# Altium PCB FlightController_Top_6x6.PcbDoc (part 2 of 6)
Units mm, origin at the board's own origin, x right, y up, seen from the top; angles counter-clockwise.
Board outline 149.8 x 149.8 mm, 2 copper layers (Top Layer, Bottom Layer); 156 components, 166 nets, 860 pads, 423 vias.
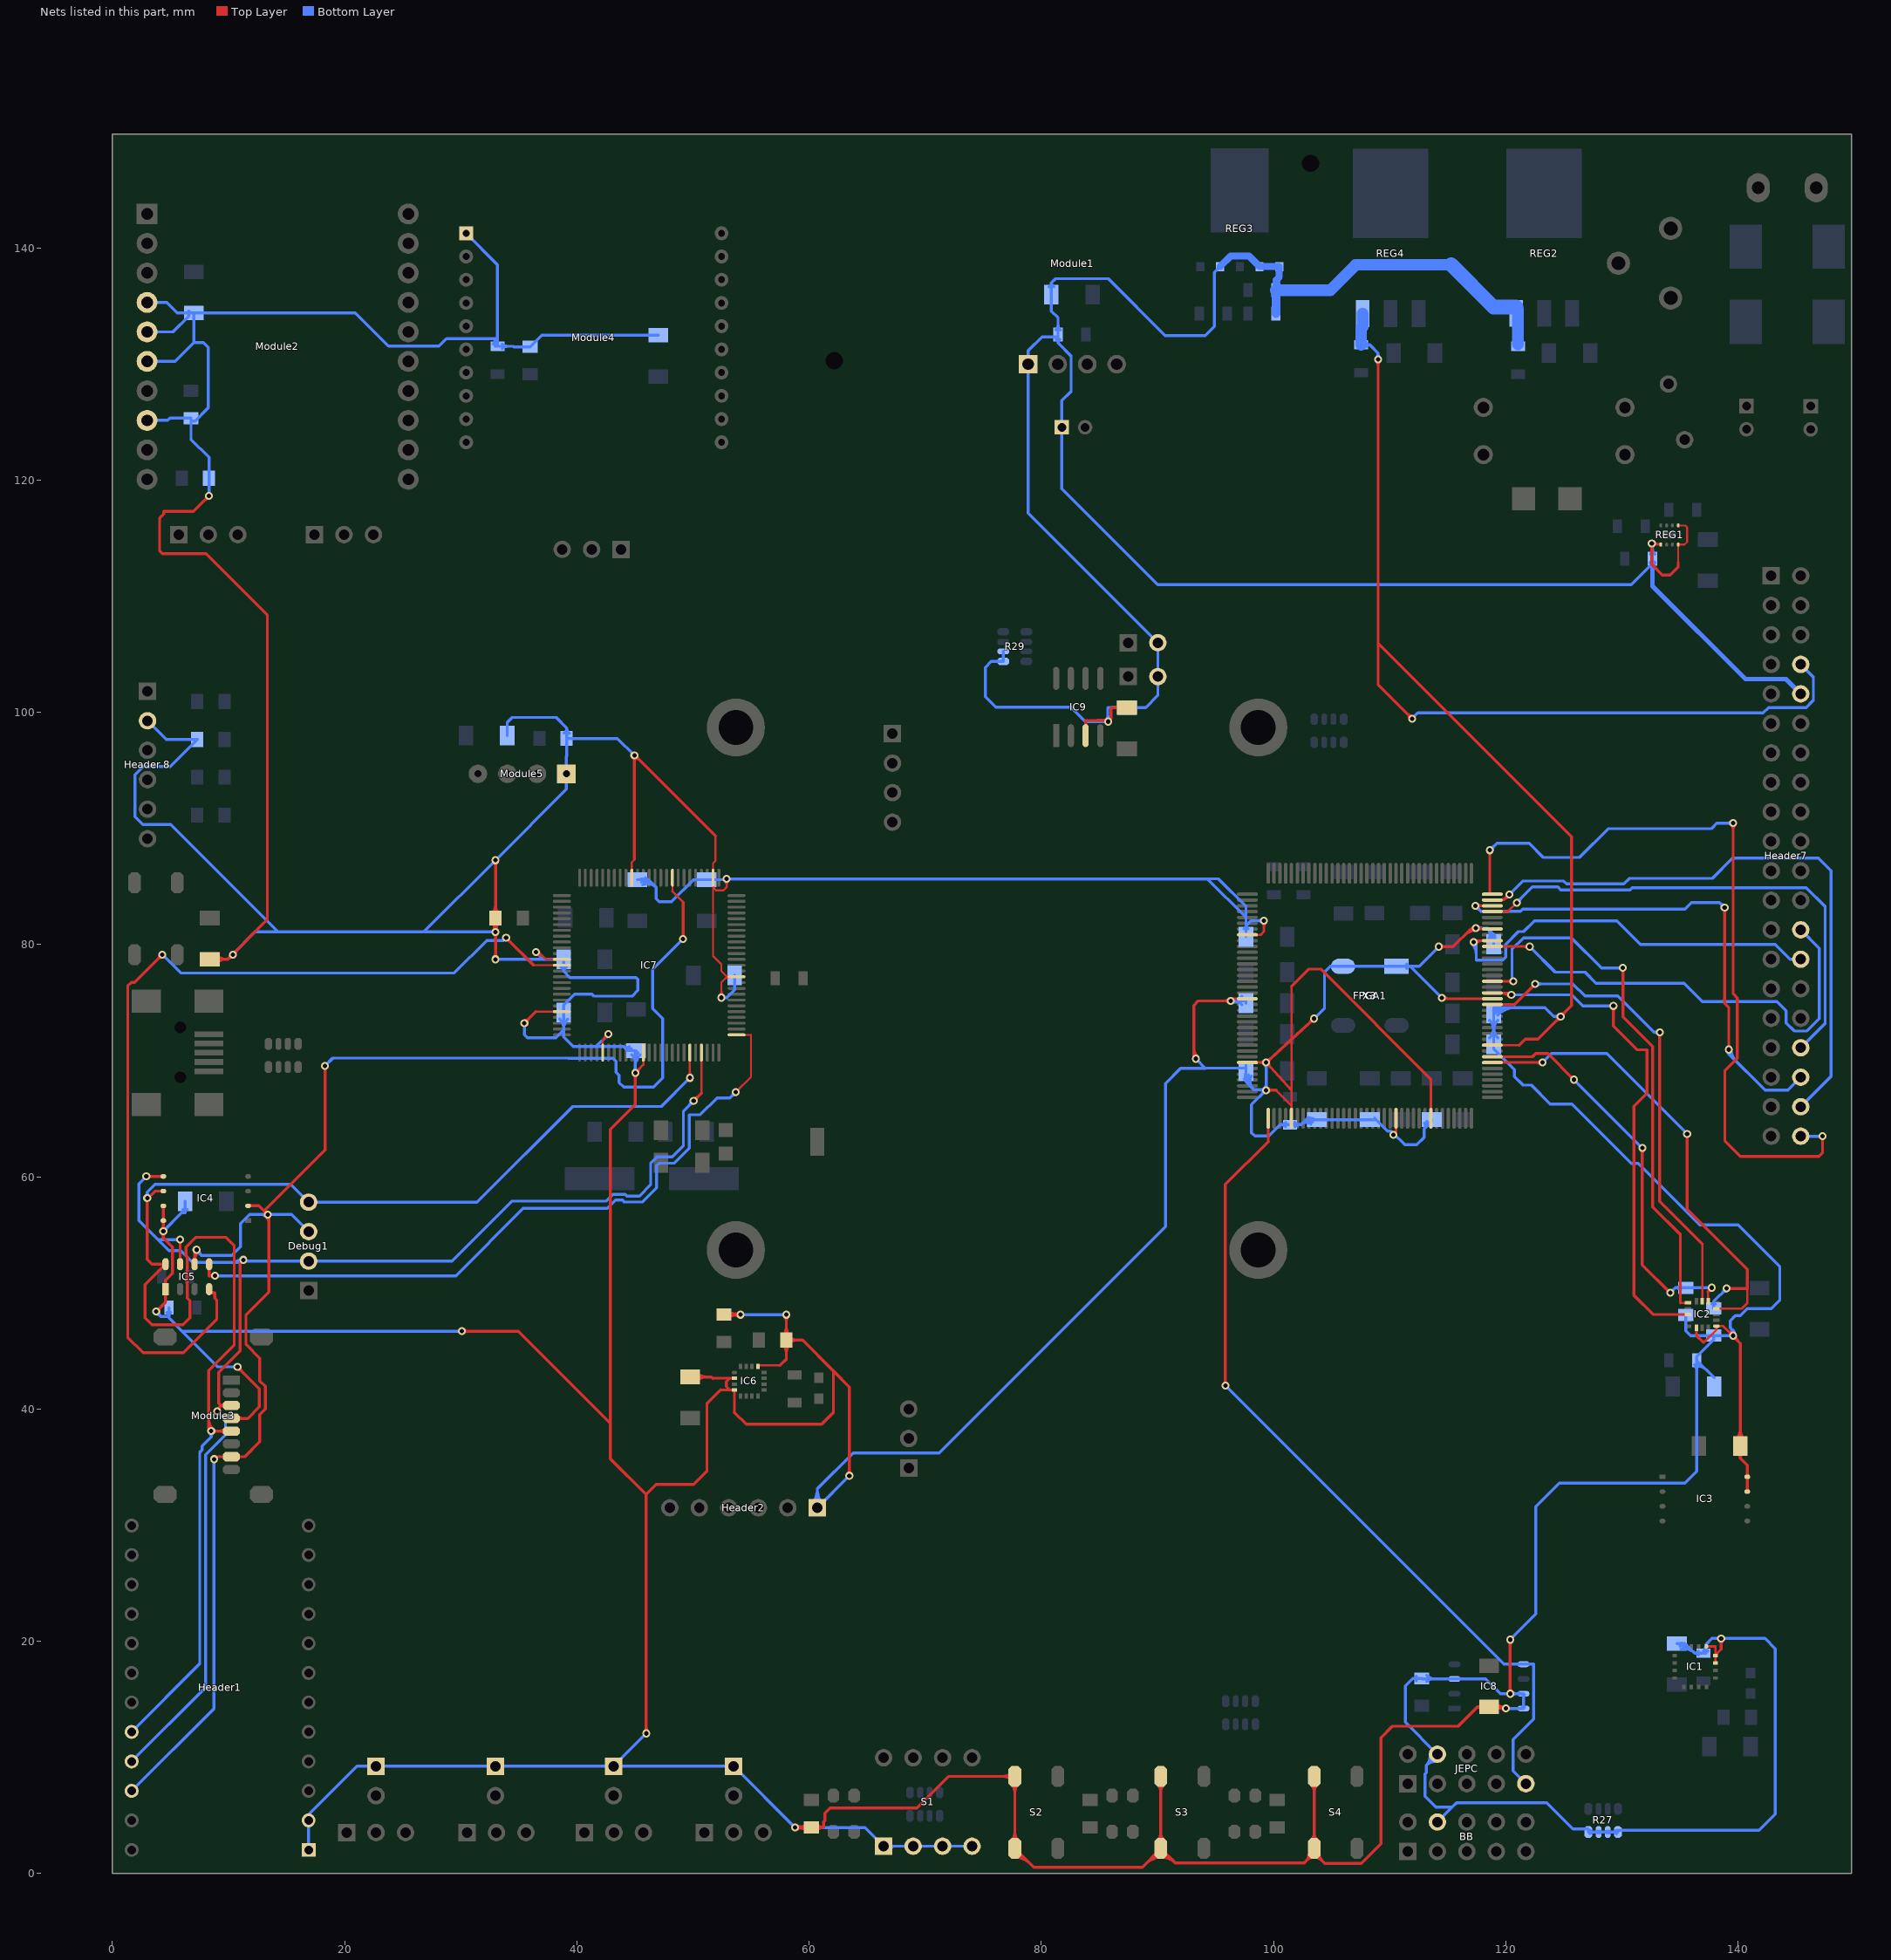
[diagram p2: the nets of this part, all layers, seen from the top]

## Via types
v1: diameter 0.686, hole 0.381, Top Layer to Bottom Layer, 391 vias
v2: diameter 1.27, hole 0.711, Top Layer to Bottom Layer, 32 vias

## Nets (pads, with @x,y where several pads share a name; then routed paths per layer and width w, separated by ;. In a path a pad name is that pad's centre, name@x,y a point inside that pad or via, vN(x,y) a via of type N, cw(c..) or ccw(c..) an arc to the next point about the centre after c; other vN are vias at no path point) (continued)
+3.3V: "Header 8.2" BB.4 C1.1 C2.2 C3.1 C4.1 C8.1 C12.1 C13.1 C14.1 C15.2 C17.1 C18.1 C19.2 C21.1 C23.2 C24.1 C25.1 C26.1 C27.1 C28.1 C29.1 C47.1 C58.1 C59.1 C62.1 C63.1 C64.1 C67.1 C68.1 C71.1 C72.1 C73.1 C75.1 FPGA1.5 FPGA1.23 FPGA1.29 FPGA1.46 FPGA1.54 FPGA1.66 FPGA1.116 FPGA1.127 FPGA1.138 Header1.1 Header1.2 Header2.1 Header7.8 IC1.1 IC1.15 IC1.16 IC2.1 IC2.14 IC3.7 IC3.8 IC4.7 IC4.8 IC5.1 IC6.2 IC6.4 IC6.13 IC7.2 IC7.16 IC7.37 IC7.46 IC7.55 IC7.62 IC7.86 IC8.3 IC8.7 IC8.8 J1.1 J2.1 J3.1 J4.1 JEPC.4 Module2.4 Module2.5 Module2.6 Module2.8 Module3.4 Module4.1 Module5.1 R1.2 R2.1 R8.1 R9.1 R10.2 R11.2 R12.2 R16.2 R17.2 R21.2 R27.5 R27.6 R27.7 R27.8 R28.1 REG4.3 S1.1 S1.2 S1.3 S1.4 S2.1 S3.1 S4.1 X3.1 X3.4 | length 1483.9
  Top Layer w0.17: 36.462,74.231 IC7.46@38.704,74.231 ; 37.359,78.731 IC7.37@38.704,78.731 ; IC7.55@42.229,70.707 42.229,71.801 ; IC7.16@44.729,85.756 44.729,87.097 ; 45.729,69.656 IC7.62@45.729,70.707 ; 51.729,79.03 51.729,84.933 ; 51.729,87.01 IC7.2@51.729,85.756 51.729,84.933 ; IC7.2@51.769,85.106 ccw(c52.285,85.106) 51.92,84.742 ; 51.983,84.679 51.729,84.933 ; 52.445,77.715 52.929,77.232 ; 52.446,76.749 52.929,77.232 ; 52.737,77.039 cw(c53.104,76.672) IC7.86@53.104,77.192 ; 52.737,77.424 ccw(c53.104,77.791) IC7.86@53.104,77.272 ; IC7.86@53.754,77.232 52.929,77.232
  Top Layer w0.175: v1@36.47,79.115 cw(c36.47,77.894) 37.333,78.757 ; v1@36.47,79.29 cw(c36.47,78.492) 37.034,79.056 ; v1@36.72,79.37 37.359,78.731 ; 42.229,71.801 v1(42.718,72.29) ; v1@42.463,72.29 cw(c41.846,72.29) 42.282,71.854 cw(c42.718,71.418) v1@42.718,72.035 ; 44.729,87.097 44.953,87.321 ; v1(45.03,68.956) 45.729,69.656 ; v1@45.03,69.212 ccw(c45.03,69.829) 45.466,69.393 ccw(c45.902,68.956) v1@45.285,68.956 ; 51.729,79.03 52.445,78.314 52.445,77.715 ; 51.729,87.01 51.938,87.219 51.938,89.353 ; 51.983,84.679 52.624,84.679 52.904,84.958 v1(52.904,85.67) ; v1@52.266,75.614 ccw(c51.83,76.05) 52.446,76.05 ccw(c53.063,76.05) v1@52.627,75.614 ; v1(52.446,75.433) 52.446,76.749 ; v1@52.723,85.489 cw(c52.287,85.053) 52.904,85.053 cw(c53.52,85.053) v1@53.084,85.489
  Top Layer w0.2: IC1.15@138.062,18.133 IC1.16@138.062,18.783 138.062,19.558 ; IC1.16@138.062,18.809 138.557,19.304 ; IC1.16@138.162,18.783 cw(c138.466,18.783) 138.251,18.998
  Top Layer w0.21: 51.699,42.65 53.183,42.65 ; 52.396,41.65 53.183,41.65 ; 52.869,41.964 53.183,41.65 ; 52.869,42.336 53.183,42.65 ; 53.564,39.721 IC6.4@53.564,41.65 53.183,41.65 ; IC6.2@53.564,42.65 53.183,42.65 ; IC6.13@55.589,43.675 55.589,43.76 57.508,43.76 ; v1(96.312,75.154) 96.502,75.344 FPGA1.127@97.752,75.344 ; FPGA1.138@97.752,69.844 v1(99.373,69.844) 101.552,67.449 ; FPGA1.116@97.752,80.844 98.903,80.844 99.182,81.123 v1(99.182,82.063) ; v1@99.014,81.895 cw(c98.608,81.488) 99.182,81.488 cw(c99.757,81.488) v1@99.351,81.895 ; v1@99.205,69.676 ccw(c98.798,69.269) 98.798,69.844 ccw(c98.798,70.419) v1@99.205,70.012 ; v1@99.362,69.606 cw(c99.335,69.032) 99.759,69.419 cw(c100.184,69.806) v1@99.611,69.833 ; 100.231,67.458 101.552,66.137 ; FPGA1.5@101.552,65.044 101.552,66.137 ; 101.552,76.393 101.552,71.843 101.552,67.449 ; v1(110.329,63.616) 110.552,63.839 FPGA1.23@110.552,65.044 ; FPGA1.29@113.552,65.044 113.552,68.424 ; v1@114.571,75.344 FPGA1.54@118.852,75.344 ; v1@114.675,75.24 cw(c114.927,74.988) 114.927,75.344 ; v1@114.675,75.576 ccw(c115.236,76.137) 115.236,75.344 ; 117.047,81.344 cw(c117.047,81.056) v1@117.251,81.26 ; v1@117.192,81.497 cw(c116.985,81.561) 116.985,81.344 v1@117.503,81.344 ; v1(117.42,81.428) v1@117.503,81.344 ; v1@117.588,81.26 cw(c117.792,81.056) 117.792,81.344 ; v1@117.588,81.596 ccw(c118.197,82.205) FPGA1.66@118.197,81.344 ; FPGA1.46@118.852,71.344 121.179,71.344 ; FPGA1.66@118.852,81.344 v1@117.503,81.344 ; 136.436,46.325 IC2.14@136.436,47.01 ; 137.06,45.741 138.153,46.833 IC2.1@138.153,47.144 138.719,47.144 v1@139.568,46.295 ; IC1.1@137.287,19.558 138.062,19.558 ; 139.094,46.769 ccw(c139.596,47.27) v1@139.596,46.561 ; 139.229,46.634 cw(c138.918,46.323) v1@139.358,46.323 ; 101.552,66.137 101.552,67.449
  Top Layer w0.254: v1(3.77,48.393) 4.572,49.195 IC5.1@4.572,50.33 4.572,51.1 5.177,51.705 5.177,53.945 4.381,54.741 v1(4.381,55.317) IC4.8@4.381,56.231 IC4.7@4.381,57.501 ; v1@3.77,48.609 ccw(c3.77,49.131) 4.139,48.762 ccw(c4.508,48.393) v1@3.986,48.393 ; v1@4.228,55.164 cw(c3.86,54.795) 4.381,54.795 cw(c4.902,54.795) v1@4.534,55.164 ; v1@4.228,55.469 ccw(c3.86,55.838) 4.381,55.838 ccw(c4.902,55.838) v1@4.534,55.469 ; IC5.1@4.467,49.975 cw(c4.215,49.723) 4.572,49.723 cw(c4.929,49.723) IC5.1@4.677,49.975 ; IC5.1@4.467,50.685 ccw(c4.215,50.937) 4.572,50.937 ccw(c4.929,50.937) IC5.1@4.677,50.685 ; v1@8.101,118.655 cw(c7.58,118.655) 7.948,118.286 cw(c8.317,117.917) v1@8.317,118.439 ; v1(8.317,118.655) 6.98,117.318 4.415,117.318 4.415,117.095 4.064,116.744 4.064,113.888 4.287,113.665 8.068,113.665 13.335,108.398 13.335,82.151 9.927,78.743 ; C15.2@8.382,78.743 9.927,78.743 ; C15.2@8.959,78.391 cw(c9.809,77.541) 9.809,78.743 cw(c9.809,79.945) C15.2@8.959,79.095 ; 10.026,78.842 ccw(c9.744,79.124) v1@10.143,79.124 ; Module3.4@10.239,39.198 11.652,39.198 12.658,40.204 12.658,41.74 v1(10.765,43.633) ; v1@10.35,78.908 ccw(c10.327,78.343) 9.927,78.743 ; v1@10.359,79.34 ccw(c10.359,79.739) 10.641,79.457 ; v1@10.575,79.124 cw(c11.219,79.124) 10.763,79.579 ; v1@10.765,43.417 cw(c10.765,42.895) 11.134,43.264 cw(c11.502,43.633) v1@10.981,43.633 ; Module3.4@10.782,39.005 cw(c11.248,38.539) 11.248,39.198 cw(c11.248,39.857) Module3.4@10.782,39.391 ; v1(30.094,46.706) 34.955,46.706 42.896,38.765 ; v1@30.247,46.553 cw(c30.616,46.185) 30.616,46.706 cw(c30.616,47.227) v1@30.247,46.859 ; R16.2@32.708,81.889 cw(c32.028,81.21) 32.989,81.21 cw(c33.95,81.21) R16.2@33.271,81.889 ; R16.2@32.708,82.702 ccw(c32.028,83.381) 32.989,83.381 ccw(c33.95,83.381) R16.2@33.271,82.702 ; v1@32.807,81.214 ccw(c32.356,81.503) 32.874,81.642 ; v1@32.837,78.888 ccw(c32.468,79.257) 32.989,79.257 ccw(c33.511,79.257) v1@33.142,78.888 ; v1@32.837,80.945 cw(c32.468,80.576) 32.989,80.576 cw(c33.511,80.576) v1@33.142,80.945 ; v1@32.837,81.25 ccw(c32.468,81.619) 32.989,81.619 ccw(c33.511,81.619) v1@33.142,81.25 ; v1@32.837,87.116 cw(c32.468,86.748) 32.989,86.748 cw(c33.511,86.748) v1@33.142,87.116 ; v1@32.881,81.285 ccw(c32.67,81.651) 33.078,81.541 ; 32.901,81.541 ccw(c33.309,81.651) v1@33.097,81.285 ; v1(32.989,78.735) v1(32.989,81.098) R16.2@32.989,82.296 v1@32.989,87.268 ; 33.105,81.642 ccw(c33.623,81.503) v1@33.171,81.214 ; v1(35.479,73.249) 36.462,74.231 ; v1@35.479,73.465 ccw(c35.479,73.986) 35.848,73.618 ccw(c36.217,73.249) v1@35.695,73.249 ; v1(36.47,79.37) v1@36.72,79.37 ; v1@44.801,96.149 cw(c44.432,95.78) 44.953,95.78 cw(c45.475,95.78) v1@45.106,96.149 ; v1@44.877,68.804 cw(c44.508,68.435) 45.03,68.435 cw(c45.551,68.435) v1@45.182,68.804 ; 44.953,87.321 v1(44.953,96.302) ; v1@44.953,96.086 cw(c44.953,95.478) 45.383,95.908 ; v1@44.989,96.302 51.938,89.353 ; v1(45.03,68.956) 45.03,66.239 42.896,64.105 42.896,38.765 ; v1@45.169,96.302 ccw(c45.604,96.302) 45.297,95.994 ; v1@45.817,12.213 ccw(c45.448,12.582) 45.969,12.582 ccw(c46.491,12.582) v1@46.122,12.213 ; v1(45.969,12.06) 45.969,32.634 ; C21.1@49.754,42.766 51.583,42.766 51.699,42.65 ; C21.1@50.331,42.414 cw(c51.181,41.564) 51.181,42.766 cw(c51.181,43.968) C21.1@50.331,43.118 ; 52.396,41.65 51.202,40.456 51.202,34.641 50.059,33.498 46.833,33.498 45.969,32.634 ; R11.2@52.675,48.135 53.786,48.135 53.793,48.128 v1(54.102,48.128) ; 52.869,41.964 52.869,42.336 ; R11.2@53.081,47.854 cw(c53.761,47.174) 53.761,48.135 cw(c53.761,49.096) R11.2@53.081,48.416 ; 53.418,48.227 ccw(c53.605,48.927) v1@53.988,48.312 ; 53.439,48.049 cw(c53.605,47.428) v1@53.977,47.952 ; 53.564,39.721 54.599,38.686 58.295,38.686 58.314,38.705 61.082,38.705 62.098,39.721 62.098,43.277 ; 53.565,48.135 cw(c53.565,47.591) v1@53.949,47.976 ; 53.596,48.135 ccw(c53.596,48.634) v1@53.949,48.281 ; 57.508,43.76 58.041,44.293 R12.2@58.041,45.944 ; R12.2@57.76,45.538 cw(c57.08,44.858) 58.041,44.858 cw(c59.002,44.858) R12.2@58.322,45.538 ; R12.2@57.76,46.35 ccw(c57.08,47.03) 58.041,47.03 ccw(c59.002,47.03) R12.2@58.322,46.35 ; v1@57.888,47.976 cw(c57.52,47.607) 58.041,47.607 cw(c58.562,47.607) v1@58.194,47.976 ; v1(58.041,48.128) R12.2@58.041,45.944 ; R12.2@58.322,45.663 cw(c59.002,44.983) 59.002,45.944 cw(c59.002,46.905) R12.2@58.322,46.225 ; v1(58.793,3.958) 59.076,3.958 59.087,3.969 R21.2@60.198,3.969 61.26,3.969 ; v1@58.903,4.143 ccw(c59.28,4.778) 59.471,4.065 ; v1@58.921,3.784 cw(c59.28,3.297) 59.437,3.882 ; v1@58.945,3.805 cw(c59.34,3.41) 59.34,3.969 ; v1@58.945,4.111 ccw(c59.288,4.453) 59.288,3.969 ; v1@58.98,3.85 cw(c59.217,3.713) 59.146,3.978 ; R21.2@59.792,3.687 ccw(c59.112,3.008) 59.112,3.969 ccw(c59.112,4.929) R21.2@59.792,4.25 ; R21.2@60.609,3.692 cw(c61.26,3.064) 61.26,3.969 ; R21.2@60.609,4.245 ccw(c61.26,4.873) 61.26,3.969 ; v1@63.317,34.413 ccw(c62.949,34.781) 63.47,34.781 ccw(c63.991,34.781) v1@63.623,34.413 ; v1(63.47,34.26) 63.47,41.905 62.098,43.277 ; S2.1@77.425,2.808 ccw(c76.703,3.53) 77.724,3.53 ccw(c78.745,3.53) S2.1@78.023,2.808 ; S2.1@77.425,7.71 cw(c76.703,6.988) 77.724,6.988 cw(c78.745,6.988) S2.1@78.023,7.71 ; S2.1@77.425,8.06 ccw(c76.703,7.338) 76.703,8.359 ccw(c76.703,9.38) S2.1@77.425,8.658 ; S2.1@77.724,1.386 cw(c77.724,-0.48) 79.044,0.839 ; S2.1@77.724,1.64 cw(c77.724,0.387) 78.61,1.273 ; 89.029,0.861 cw(c90.297,-0.408) S3.1@90.297,1.386 ; 89.462,1.294 cw(c90.297,0.46) S3.1@90.297,1.64 ; S3.1@89.998,2.808 ccw(c89.276,3.53) 90.297,3.53 ccw(c91.318,3.53) S3.1@90.596,2.808 ; S3.1@89.998,7.71 cw(c89.276,6.988) 90.297,6.988 cw(c91.318,6.988) S3.1@90.596,7.71 ; S3.1@90.297,8.359 S3.1@90.297,2.159 ; S3.1@90.305,1.64 cw(c90.356,0.533) 91.139,1.317 ; S3.1@90.316,1.386 cw(c90.391,-0.245) 91.546,0.91 ; 93.137,70.513 ccw(c93.653,70.513) v1@93.288,70.149 ; 93.137,71.126 ccw(c94.266,71.126) v1@93.468,70.328 ; v1(93.315,70.176) 93.137,70.353 93.137,74.773 93.518,75.154 v1(96.312,75.154) ; v1@96.159,75.001 ccw(c95.791,74.633) 95.791,75.154 ccw(c95.791,75.675) v1@96.159,75.307 ; v1(99.36,67.458) 100.231,67.458 ; v1(99.373,69.844) 101.552,71.843 v1(103.5,73.63) ; v1@99.382,70.06 ccw(c99.405,70.581) 99.757,70.196 ccw(c100.11,69.812) v1@99.589,69.835 ; v1@99.513,67.305 cw(c99.882,66.936) 99.882,67.458 cw(c99.882,67.979) v1@99.513,67.611 ; 101.552,76.393 103.056,77.897 104.079,77.897 113.552,68.424 ; 102.761,1.034 ccw(c101.986,1.809) S4.1@103.082,1.809 ; 102.836,1.109 cw(c103.505,0.44) 103.505,1.386 cw(c103.505,0.44) 104.174,1.109 ; S4.1@103.206,2.808 ccw(c102.484,3.53) 103.505,3.53 ccw(c104.526,3.53) S4.1@103.804,2.808 ; S4.1@103.206,7.71 cw(c102.484,6.988) 103.505,6.988 cw(c104.526,6.988) S4.1@103.804,7.71 ; v1@103.285,73.639 cw(c102.764,73.662) 103.116,73.278 cw(c103.469,72.893) v1@103.491,73.414 ; S4.1@103.505,8.359 S4.1@103.505,2.159 ; S4.1@103.928,1.809 ccw(c105.024,1.809) 104.249,1.034 ; v1@108.859,130.246 cw(c108.491,129.878) 109.012,129.878 cw(c109.534,129.878) v1@109.165,130.246 ; v1(109.012,130.399) 109.012,105.957 ; v1@111.724,99.468 ccw(c111.203,99.468) 111.572,99.837 ccw(c111.94,100.205) v1@111.94,99.684 ; v1(111.94,99.468) 109.012,102.396 109.012,105.957 ; v1(114.245,79.828) 115.468,79.828 116.985,81.344 ; v1@114.397,79.675 cw(c114.766,79.306) 114.766,79.828 cw(c114.766,80.349) v1@114.397,79.98 ; v1(114.507,75.408) v1@114.571,75.344 ; 116.452,80.811 cw(c117.42,79.843) v1@117.42,81.212 ; 116.885,81.244 cw(c117.42,80.71) v1@117.42,81.466 ; C64.1@117.882,14.143 ccw(c117.58,14.013) 117.58,14.341 ; C64.1@117.882,14.54 cw(c117.58,14.67) 117.58,14.341 ; C64.1@119.165,14.016 cw(c119.878,13.398) v1@119.878,14.341 ; C64.1@119.165,14.667 ccw(c119.878,15.285) v1@119.878,14.341 ; C64.1@119.173,14.341 cw(c119.173,13.376) v1@119.856,14.059 ; C64.1@119.314,14.493 cw(c119.098,13.686) v1@119.821,14.103 ; v1(120.008,14.211) v1@119.878,14.341 ; v1@120.239,15.634 ccw(c119.87,16.003) 120.391,16.003 ccw(c120.913,16.003) v1@120.544,15.634 ; v1@120.239,19.985 cw(c119.87,19.616) 120.391,19.616 cw(c120.913,19.616) v1@120.544,19.985 ; v1(120.391,15.481) v1(120.391,20.138) ; 121.179,71.344 121.685,71.851 122.778,71.851 v1(124.735,73.808) 125.675,74.748 125.675,89.295 109.012,105.957 ; v1@124.519,73.808 cw(c123.997,73.808) 124.366,73.439 cw(c124.735,73.07) v1@124.735,73.592 ; v1@124.735,74.024 ccw(c124.735,74.545) 125.104,74.177 ccw(c125.472,73.808) v1@124.951,73.808 ; 136.436,46.325 137.02,45.741 137.06,45.741 ; v1@138.404,20.086 cw(c138.036,19.718) 138.557,19.718 cw(c139.078,19.718) v1@138.71,20.086 ; 138.557,19.304 v1(138.557,20.239) ; v1@139.596,46.107 cw(c139.596,45.72) 139.869,45.994 ; v1(139.596,46.323) 139.568,46.295 140.205,45.658 C8.1@140.205,36.83 140.205,35.779 ; v1@139.812,46.323 ccw(c140.468,46.323) 140.004,45.859 ; C8.1@139.853,37.407 ccw(c139.003,38.257) 140.205,38.257 ccw(c141.407,38.257) C8.1@140.557,37.407 ; C8.1@139.973,36.165 cw(c139.77,35.779) 140.205,35.779 ; C8.1@140.437,36.165 ccw(c140.64,35.779) 140.205,35.779 ; IC3.7@140.81,32.893 IC3.8@140.81,34.163 140.81,35.174 140.205,35.779 ; 42.896,38.765 42.896,35.708 45.969,32.634 ; R12.2@58.041,45.944 59.431,45.944 62.098,43.277 ; 61.26,3.969 61.26,4.44 61.362,4.542 61.362,5.177 61.819,5.634 69.287,5.634 72.011,8.359 S2.1@77.724,8.359 S2.1@77.724,2.159 79.352,0.531 88.699,0.531 90.297,2.129 S3.1@90.297,2.159 ; S3.1@90.297,2.159 91.546,0.91 ; 91.546,0.91 102.637,0.91 S4.1@103.505,1.778 ; S4.1@103.505,1.778 S4.1@103.505,2.159 ; S4.1@103.505,1.778 S4.1@103.505,2.159 ; S4.1@103.505,1.778 104.424,0.859 107.564,0.859 109.254,2.548 109.254,11.692 110.244,12.683 115.921,12.683 117.58,14.341 ; 117.58,14.341 C64.1@118.564,14.341 v1@119.878,14.341
  Bottom Layer w0.254: Module2.8@2.981,125.155 4.771,125.155 4.963,125.347 R8.1@6.761,125.347 R8.1@6.761,125.095 ; Module2.6@2.981,130.235 5.394,130.235 7.015,131.856 ; Module2.5@2.981,132.775 5.216,132.775 6.547,134.106 C12.1@6.547,134.399 ; Module2.4@2.981,135.315 4.668,135.315 5.584,134.399 C12.1@6.547,134.399 ; 3.018,99.284 4.627,97.675 R17.2@7.304,97.675 4.976,95.347 2.637,95.347 1.926,94.636 1.926,91.029 2.612,90.343 5.025,90.343 14.27,81.098 ; v1@3.77,48.177 cw(c3.77,47.745) 4.075,48.051 ; v1(3.77,48.393) 3.77,48.356 4.161,47.965 ; v1@3.986,48.392 ccw(c4.583,48.388) 4.161,47.965 ; v1(4.381,55.317) 5.968,56.904 6.256,56.904 ; C14.1@4.694,48.326 cw(c4.402,47.965) 4.866,47.965 cw(c5.33,47.965) C14.1@5.038,48.326 ; C14.1@4.866,48.738 4.866,47.965 ; C13.1@6.061,57.199 cw(c5.935,56.904) 6.256,56.904 ; C13.1@6.256,57.882 6.256,56.904 ; C13.1@6.451,57.199 ccw(c6.577,56.904) 6.256,56.904 ; v1(8.317,118.655) R9.1@8.317,120.172 8.317,121.966 6.761,123.522 R8.1@6.761,125.095 ; v1@10.384,79.2 12.281,81.098 14.27,81.098 ; v1(10.765,43.633) 9.082,43.633 6.009,46.706 ; Header1.1@16.891,2.032 Header1.2@16.891,4.572 16.891,5.08 21.052,9.241 J1.1@22.703,9.241 J2.1@32.99,9.241 J4.1@43.15,9.241 ; v1(30.094,46.706) 6.009,46.706 ; Module4.1@30.462,141.267 33.168,138.561 C18.1@33.168,131.532 ; C18.1@32.784,131.725 ccw(c32.348,132.161) 32.965,132.161 ; v1(32.989,78.735) 37.105,78.735 ; v1(32.989,81.098) 26.818,81.098 ; v1(32.989,87.269) 39.096,93.376 Module5.1@39.096,94.712 39.096,96.211 39.118,96.233 R10.2@39.118,97.76 R10.2@39.137,97.76 ; v1(32.989,87.269) 26.818,81.098 ; C18.1@33.166,131.729 cw(c33.622,132.202) 32.965,132.202 ; C18.1@33.57,131.339 cw(c34.036,130.873) 34.036,131.532 cw(c34.036,132.191) C18.1@33.57,131.725 ; C17.1@34.003,98.014 34.003,99.154 34.417,99.568 38.218,99.568 39.137,98.649 ; v1(35.479,73.249) 35.479,72.233 35.733,71.979 38.197,71.979 38.866,72.648 ; v1(36.47,79.37) 37.105,78.735 ; C25.1@38.514,73.59 cw(c37.664,72.74) 38.866,72.74 cw(c40.069,72.74) C25.1@39.218,73.59 ; C24.1@38.644,78.069 cw(c38.466,77.71) 38.866,77.71 ; C24.1@38.866,78.74 C24.1@38.866,78.735 ; R10.2@38.903,98.22 ccw(c38.626,98.649) 39.137,98.649 ; C24.1@39.088,78.069 ccw(c39.266,77.71) 38.866,77.71 ; R10.2@39.359,98.202 cw(c39.698,98.649) 39.137,98.649 ; v1(42.718,72.29) 41.658,71.23 ; 44.203,71.047 ccw(c44.449,71.293) C27.1@44.691,71.044 ; C27.1@44.515,71.226 cw(c44.27,71.479) 44.021,71.23 ; C27.1@44.734,70.516 cw(c44.021,69.803) 45.03,69.803 ; v1@44.877,69.109 ccw(c44.508,69.478) 45.03,69.478 ccw(c45.551,69.478) v1@45.182,69.109 ; v1(44.953,96.302) 43.495,97.76 R10.2@39.137,97.76 ; v1(45.03,68.956) C27.1@45.03,70.869 ; 45.03,69.529 cw(c46.426,69.529) C27.1@45.438,70.516 ; 45.03,70.142 cw(c45.812,70.142) C27.1@45.259,70.696 ; C27.1@45.086,70.869 C27.1@45.03,70.869 ; C28.1@45.213,85.595 46.159,85.595 ; C28.1@45.434,85.604 cw(c45.758,84.901) 46.305,85.448 ; C28.1@45.541,85.373 cw(c45.921,84.549) 46.563,85.191 ; C28.1@45.647,85.142 cw(c46.083,84.196) 46.82,84.933 ; C28.1@45.904,85.419 cw(c46.159,85.323) 46.159,85.595 ; C28.1@45.904,85.77 ccw(c46.159,85.866) 46.159,85.595 ; v1(45.969,12.06) J4.1@43.15,9.241 ; C23.2@47.02,132.488 36.973,132.488 C19.2@35.971,131.486 34.585,131.486 34.539,131.532 C18.1@33.177,131.532 C18.1@33.168,131.532 ; v1(52.446,75.433) 52.929,75.433 ; v1@52.607,75.29 cw(c52.929,75.002) 52.929,75.433 ; v1@52.607,75.577 ccw(c52.929,75.864) 52.929,75.433 ; v1(52.904,85.67) 95.245,85.67 97.637,83.278 97.637,82.338 ; C29.1@53.592,77.343 53.592,76.097 52.929,75.433 ; v1(54.102,48.128) v1(58.041,48.128) ; Header2.1@60.265,31.937 ccw(c59.202,33) 60.706,33 ccw(c62.21,33) Header2.1@61.147,31.937 ; Header2.1@60.445,31.757 ccw(c59.815,32.387) 60.706,32.387 ccw(c61.597,32.387) Header2.1@60.967,31.757 ; v1(63.47,34.26) Header2.1@60.706,31.496 60.706,33.122 63.8,36.216 71.217,36.216 90.699,55.698 90.699,68.042 91.999,69.342 94.149,69.342 94.128,69.363 ; S1.1@67.026,2.202 cw(c67.213,2.157) 67.213,2.35 ; S1.1@67.026,2.497 ccw(c67.213,2.542) 67.213,2.35 ; S1.4@74.041,2.35 S1.3@71.501,2.35 S1.2@68.961,2.35 67.213,2.35 ; v1(93.315,70.176) 94.128,69.363 ; 94.077,69.363 94.128,69.363 ; v1(96.312,75.154) 97.637,75.154 C75.1@97.637,74.959 ; v1@96.362,75.154 ccw(c96.362,76.458) C75.1@97.285,75.536 ; v1@96.42,74.967 cw(c96.767,74.366) 96.946,75.036 ; v1@96.465,75.001 cw(c96.834,74.633) 96.834,75.154 cw(c96.834,75.675) v1@96.465,75.307 ; v1@96.499,75.262 ccw(c96.802,75.437) 96.711,75.099 ; v1@96.507,75.154 cw(c96.507,74.054) C75.1@97.285,74.832 ; 96.976,75.154 ccw(c96.976,75.845) C75.1@97.464,75.356 ; C71.1@97.459,68.427 cw(c97.361,68.169) 97.637,68.169 ; C71.1@97.628,68.896 ccw(c98.331,68.571) 97.783,68.023 ; C71.1@97.637,69.668 C71.1@97.637,69.363 ; C63.1@97.637,80.674 97.637,81.631 ; C71.1@97.814,68.427 ccw(c97.913,68.169) 97.637,68.169 ; C71.1@97.858,68.789 ccw(c98.682,68.408) 98.04,67.766 ; C71.1@98.089,68.683 ccw(c99.034,68.245) 98.297,67.509 ; 98.716,67.509 cw(c98.716,66.814) v1@99.207,67.305 ; 98.961,67.509 ccw(c98.961,67.857) 99.207,67.611 ccw(c98.808,68.01) 99.373,68.01 ; v1@99.03,81.91 ccw(c98.661,81.541) 98.661,82.063 ccw(c98.661,82.584) v1@99.03,82.216 ; v1(99.182,82.063) 98.069,82.063 97.637,81.631 ; v1@99.22,69.691 cw(c98.851,69.323) 99.373,69.323 cw(c99.894,69.323) v1@99.526,69.691 ; v1(99.36,67.458) 98.116,66.213 98.116,63.8 98.395,63.521 99.614,63.521 100.581,64.488 C73.1@101.444,64.488 102.357,64.488 ; 99.373,67.949 ccw(c99.851,67.949) v1@99.513,67.611 ; v1(99.373,69.844) 99.373,67.509 98.297,67.509 ; C73.1@101.051,64.295 ccw(c100.585,63.829) 100.585,64.488 ccw(c100.585,65.147) C73.1@101.051,64.681 ; C73.1@101.837,64.295 cw(c102.303,63.829) 102.303,64.488 cw(c102.303,65.147) C73.1@101.837,64.681 ; 102.56,64.69 cw(c102.983,64.267) C58.1@103.354,64.737 ; 102.762,64.892 cw(c103.161,64.493) C58.1@103.511,64.937 ; C58.1@103.036,64.762 ccw(c102.798,64.677) 102.798,64.929 ; C58.1@103.036,65.096 cw(c102.798,65.181) 102.798,64.929 ; C58.1@103.197,64.538 ccw(c102.805,64.04) 102.357,64.488 ; v1(103.5,73.63) 104.396,74.525 104.396,77.632 104.897,78.134 X3.4@106.002,78.134 X3.1@110.602,78.134 111.781,78.134 ; C47.1@107.549,131.659 108.301,131.659 ; C47.1@107.966,131.493 cw(c108.301,131.237) 108.301,131.659 ; C47.1@107.966,131.825 ccw(c108.301,132.081) 108.301,131.659 ; v1@108.859,130.552 ccw(c108.491,130.92) 109.012,130.92 ccw(c109.534,130.92) v1@109.165,130.552 ; v1(109.012,130.399) 109.012,130.948 108.301,131.659 ; v1(110.329,63.616) v1@110.397,63.684 ; X3.1@111.486,77.936 cw(c111.781,77.816) 111.781,78.134 ; X3.1@111.486,78.332 ccw(c111.781,78.452) 111.781,78.134 ; v1(111.94,99.468) 112.43,99.957 142.172,99.957 142.642,100.427 145.893,100.427 146.503,101.037 146.503,103.052 Header7.8@145.415,104.14 ; R28.1@112.3,16.609 ccw(c111.988,16.443) 111.988,16.796 ; R28.1@112.3,16.983 cw(c111.988,17.149) 111.988,16.796 ; R28.1@112.776,16.751 IC8.3@115.589,16.751 118.287,16.751 119.557,15.481 v1(120.391,15.481) IC8.7@121.539,15.481 IC8.8@121.539,14.211 v1(120.008,14.211) ; R28.1@112.776,16.796 111.988,16.796 ; C72.1@113.008,64.636 cw(c112.694,64.407) 112.969,64.132 ; C72.1@113.168,64.33 cw(c113.411,64.087) C72.1@113.411,64.431 ; C72.1@113.179,64.342 ccw(c112.937,64.584) C72.1@113.214,64.785 ; R28.1@113.182,16.515 cw(c113.754,15.943) 113.754,16.751 ; R28.1@113.182,17.077 ccw(c113.969,17.864) 113.969,16.751 ; JEPC.4@113.498,10.225 cw(c112.349,10.134) 113.164,9.319 ; C72.1@113.636,64.929 113.636,64.799 112.969,64.132 ; JEPC.4@113.751,10.245 cw(c113.07,10.191) 113.553,9.709 cw(c114.036,9.226) JEPC.4@114.089,9.907 ; JEPC.4@114.069,9.653 ccw(c113.978,8.505) 113.164,9.319 ; BB.4@114.119,4.432 115.397,5.71 ; v1(114.245,79.828) 112.551,78.134 111.781,78.134 ; v1(114.507,75.408) 111.781,78.134 ; v1(117.42,81.428) 118.436,81.428 ; v1@117.572,81.275 cw(c117.941,80.906) 117.941,81.428 cw(c117.941,81.949) v1@117.572,81.581 ; C62.1@118.542,80.524 ccw(c117.916,80.908) 118.436,81.428 ; C67.1@118.615,71.98 ccw(c117.765,72.83) 118.967,72.83 ccw(c120.169,72.83) C67.1@119.319,71.98 ; C59.1@118.615,73.493 cw(c117.765,72.643) 118.967,72.643 cw(c120.169,72.643) C59.1@119.319,73.493 ; 118.663,81.2 cw(c118.199,80.735) C62.1@118.759,80.391 ; C62.1@118.85,80.748 ccw(c118.814,80.896) 118.967,80.896 ; 118.891,80.972 cw(c118.481,80.562) C62.1@118.975,80.259 ; C59.1@118.96,74.302 cw(c119.606,73.656) 119.606,74.57 ; C62.1@118.967,80.039 118.967,80.896 ; C62.1@119.084,80.748 cw(c119.12,80.896) 118.967,80.896 ; C59.1@119.14,74.122 cw(c120.22,73.042) 120.22,74.57 ; C59.1@119.319,73.943 cw(c120.833,72.429) 120.833,74.57 ; v1(120.391,20.138) 122.601,22.347 122.601,31.593 124.633,33.625 135.428,33.625 136.444,34.641 136.444,43.506 ; v1@120.544,15.329 cw(c120.913,14.96) 120.913,15.481 cw(c120.913,16.003) v1@120.544,15.634 ; IC8.7@121.182,15.395 ccw(c120.972,15.185) 120.972,15.481 ccw(c120.972,15.778) IC8.7@121.182,15.568 ; IC8.8@121.452,14.298 ccw(c121.242,14.508) 121.539,14.508 ccw(c121.836,14.508) IC8.8@121.626,14.298 ; IC8.7@121.452,15.395 cw(c121.242,15.185) 121.539,15.185 cw(c121.836,15.185) IC8.7@121.626,15.395 ; v1@124.582,73.655 ccw(c124.213,73.286) 124.213,73.808 ccw(c124.213,74.329) v1@124.582,73.961 ; v1(124.735,73.808) 124.151,73.808 123.389,74.57 118.967,74.57 C59.1@118.967,74.07 C67.1@118.967,71.403 118.967,71.041 120.766,69.242 120.766,68.645 121.509,67.902 122.208,67.902 123.841,66.268 125.709,66.268 130.805,61.172 131.427,61.172 136.724,55.875 140.034,55.875 143.607,52.302 143.607,49.373 142.87,48.636 140.813,48.636 140.212,48.035 139.781,48.035 139.357,47.611 139.357,47.011 ; R27.8@127.262,3.432 cw(c127.6,3.094) 127.6,3.572 cw(c127.6,4.05) R27.8@127.262,3.712 ; R27.7@127.91,3.485 ccw(c127.7,3.275) 127.7,3.572 ccw(c127.7,3.869) R27.7@127.91,3.659 ; R27.7@128.084,3.485 cw(c128.294,3.275) 128.294,3.572 cw(c128.294,3.869) R27.7@128.084,3.659 ; R27.6@128.71,3.485 ccw(c128.5,3.275) 128.5,3.572 ccw(c128.5,3.869) R27.6@128.71,3.659 ; R27.6@128.884,3.485 cw(c129.094,3.275) 129.094,3.572 cw(c129.094,3.869) R27.6@128.884,3.659 ; R27.5@129.532,3.432 ccw(c129.194,3.094) 129.194,3.572 ccw(c129.194,4.05) R27.5@129.532,3.712 ; C2.2@134.747,19.809 135.454,19.809 136.283,18.98 ; C2.2@134.97,19.819 cw(c135.13,19.124) 135.634,19.628 ; C2.2@135.027,19.571 cw(c135.252,18.597) 135.959,19.304 ; C2.2@135.084,19.324 cw(c135.373,18.071) 136.283,18.98 ; R2.1@135.509,48.101 135.509,46.736 135.922,46.323 R1.2@137.922,46.323 ; C3.1@136.262,43.803 cw(c135.822,43.363) 136.444,43.363 ; C3.1@136.303,43.769 cw(c136.127,43.506) 136.444,43.506 ; C3.1@136.316,43.761 cw(c136.17,43.516) 136.455,43.516 ; 136.444,43.311 cw(c137.14,43.311) C3.1@136.648,43.803 ; C3.1@136.455,43.723 cw(c136.455,42.581) 137.262,43.389 ; C3.1@136.455,43.977 cw(c136.455,43.448) C3.1@136.829,43.822 ; C3.1@136.591,43.759 ccw(c136.737,43.506) 136.444,43.506 ; C3.1@136.594,43.761 ccw(c136.74,43.516) 136.455,43.516 ; C1.1@136.616,18.815 ccw(c136.283,18.562) 136.283,18.98 ; C1.1@136.616,19.145 cw(c136.283,19.398) 136.283,18.98 ; C1.1@137.04,19.173 ccw(c136.577,19.636) 137.232,19.636 ; 137.232,19.643 ccw(c137.896,19.643) C1.1@137.426,19.173 ; C4.1@137.949,42.702 C3.1@136.455,44.196 ; v1@139.415,46.442 ccw(c139.037,46.691) 139.357,47.011 ; v1@139.461,46.492 ccw(c139.236,46.772) 139.596,46.772 ; 139.578,46.791 cw(c139.303,46.516) v1@139.628,46.302 ; v1@139.731,46.492 cw(c139.955,46.772) 139.596,46.772 ; 4.161,47.965 4.866,47.965 ; 4.866,47.965 4.866,47.849 6.009,46.706 ; C12.1@6.547,134.399 6.547,134.582 C12.1@6.731,134.399 ; C12.1@6.547,134.399 C12.1@6.731,134.399 ; C12.1@6.731,134.399 C12.1@7.015,134.399 ; R8.1@6.761,125.095 7.112,125.095 8.255,126.238 8.255,131.445 7.844,131.856 7.015,131.856 ; 7.015,131.856 C12.1@7.015,134.399 ; C12.1@7.015,134.399 20.92,134.399 23.777,131.542 28.113,131.542 28.774,132.202 32.965,132.202 ; 14.27,81.098 26.818,81.098 ; 32.965,132.202 32.965,131.532 C18.1@33.168,131.532 ; 37.105,78.735 C24.1@38.866,78.735 ; 38.866,72.648 38.866,72.053 39.69,71.23 41.658,71.23 ; 38.866,72.648 C25.1@38.866,74.168 38.866,74.798 39.794,75.726 41.309,75.726 41.474,75.56 44.75,75.56 45.258,76.068 45.258,77.008 45.093,77.173 39.404,77.173 38.866,77.71 ; 38.866,77.71 C24.1@38.866,78.735 ; R10.2@39.137,97.76 39.137,98.649 ; 41.658,71.23 44.021,71.23 ; J4.1@43.15,9.241 J3.1@53.509,9.241 v1(58.793,3.958) 64.813,3.958 S1.1@66.421,2.35 66.817,1.953 67.213,2.35 ; 44.021,71.23 44.382,70.869 C27.1@45.03,70.869 ; 46.159,85.595 46.82,84.933 ; 46.82,84.933 46.82,83.968 47.087,83.701 48.154,83.701 50.047,85.595 C26.1@51.182,85.595 52.673,85.595 52.736,85.657 94.318,85.657 97.637,82.338 ; 94.128,69.363 C71.1@97.637,69.363 ; 97.637,68.169 98.297,67.509 ; 97.637,68.169 C71.1@97.637,69.117 C71.1@97.637,69.363 ; 97.637,81.631 ccw(c97.926,81.631) 97.82,81.362 cw(c97.926,81.631) 97.637,81.631 ; 97.637,81.631 cw(c97.348,81.631) 97.454,81.362 ccw(c97.348,81.631) 97.637,81.631 ; 97.637,81.631 97.637,82.338 ; 102.357,64.488 102.798,64.929 ; 102.798,64.929 C58.1@103.73,64.929 106.047,64.929 C68.1@108.302,64.929 108.712,64.929 108.712,65.066 109.825,63.953 110.128,63.953 v1@110.397,63.684 ; v1@110.397,63.684 111.204,62.877 111.305,62.776 112.352,62.776 112.969,63.393 112.969,64.132 ; 111.988,16.796 111.349,16.157 111.349,13.044 JEPC.4@114.119,10.274 113.164,9.319 ; 113.164,9.319 113.164,8.689 113.042,8.567 113.042,6.65 113.981,5.71 115.397,5.71 ; 115.397,5.71 115.778,6.091 123.541,6.091 125.802,3.831 127.122,3.831 R27.8@127.122,3.572 R27.7@127.997,3.572 R27.6@128.797,3.572 R27.5@129.672,3.572 129.672,3.729 141.829,3.729 143.218,5.118 143.218,19.358 142.337,20.239 v1(138.557,20.239) 137.765,20.239 137.232,19.706 137.232,18.98 C1.1@137.033,18.98 136.283,18.98 ; 118.436,81.428 118.967,80.896 ; 136.444,43.506 136.455,43.516 ; 136.455,43.516 C3.1@136.455,44.196 ; C3.1@136.455,44.196 136.455,44.522 137.922,45.989 R1.2@137.922,46.323 ; R1.2@137.922,46.323 v1(139.596,46.323) 139.596,46.772 ; 139.357,47.011 139.596,46.772
  Bottom Layer w1: C47.1@107.549,131.659 107.549,133.076 107.676,133.203 REG4.3@107.676,134.35
  other v1: 10.359,79.124
+5.0V: C9.2 C10.1 C11.1 C39.1 C41.1 C45.1 C48.1 C78.2 C79.2 Header7.10 IC9.3 J5.2 J6.2 Module1.1 R29.1 R29.2 REG1.1 REG1.4 REG1.5 REG2.3 REG3.1 REG3.2 REG3.4 | length 239
  Top Layer w0.17: v1(132.588,114.554) 132.689,114.453 REG1.1@133.362,114.453 cw(c133.362,115.209) v1@132.785,114.721 ; v1@132.655,114.611 ccw(c132.995,114.899) 132.995,114.453 ; v1@132.77,114.372 cw(c132.967,114.175) 132.967,114.453 ; 134.862,112.944 REG1.4@134.862,114.453 ; REG1.4@134.862,114.542 REG1.4@134.862,114.453 ; REG1.5@134.862,116.103 135.484,116.103 135.636,115.951 135.636,114.681 135.408,114.453 REG1.4@134.862,114.453
  Top Layer w0.175: v1(132.588,114.554) 132.588,114.367 v1@132.634,114.321
  Top Layer w0.254: IC9.3@83.82,98.004 83.82,99.309 84.833,99.309 84.845,99.321 85.641,99.321 v1(85.75,99.212) 86.006,99.468 ; v1@85.812,99.419 ccw(c85.868,99.607) 86.006,99.468 ; v1@85.957,99.274 cw(c86.145,99.33) 86.006,99.468 ; C78.2@87.376,100.414 86.064,100.414 86.006,100.357 86.006,99.468 ; v1@132.588,114.367 132.588,112.754 133.498,111.844 134.158,111.844 134.862,112.548 134.862,112.944
  Bottom Layer w0.254: R29.2@76.724,105.264 R29.1@76.724,104.389 75.687,104.389 75.184,103.886 75.184,101.346 76.073,100.457 82.55,100.457 83.795,99.212 v1(85.75,99.212) 85.75,99.615 ; C9.2@80.657,136.661 ccw(c80.493,137.003) 80.872,137.003 ; C9.2@81.087,136.661 cw(c81.251,137.003) 80.872,137.003 ; C11.1@81.254,132.951 ccw(c80.788,133.417) 81.447,133.417 ccw(c82.106,133.417) C11.1@81.64,132.951 ; C11.1@81.286,132.137 cw(c81.056,131.821) 81.447,131.821 ; C11.1@81.608,132.137 ccw(c81.838,131.821) 81.447,131.821 ; v1@85.597,99.365 ccw(c85.288,99.673) 85.725,99.673 ; v1@85.606,99.373 ccw(c85.367,99.64) 85.725,99.64 ; v1@85.63,99.392 ccw(c85.482,99.615) 85.75,99.615 ; 85.725,99.793 ccw(c86.331,99.793) v1@85.903,99.365 ; v1@85.862,99.397 cw(c86.009,99.64) 85.725,99.64 ; v1@85.869,99.392 cw(c86.018,99.615) 85.75,99.615 ; 86.051,100.427 86.064,100.414 ; REG3.4@95.404,138.4 94.901,137.897 94.901,133.255 94.107,132.461 90.678,132.461 85.78,137.359 81.228,137.359 80.872,137.003 ; v1@132.435,114.401 cw(c131.929,113.895) 132.645,113.895 ; C39.1@132.452,113.639 ccw(c131.986,114.105) 132.645,114.105 ccw(c133.304,114.105) C39.1@132.838,113.639 ; v1(132.588,114.554) 132.588,114.367 132.645,114.31 C39.1@132.645,113.246 132.645,112.833 130.81,110.998 90.043,110.998 81.774,119.267 C10.1@81.774,124.557 81.774,126.859 82.571,127.656 82.571,130.698 81.447,131.821 ; 132.645,114.17 cw(c132.972,114.17) v1@132.741,114.401 ; 80.872,137.003 C9.2@80.872,135.987 80.872,134.555 81.447,133.98 C11.1@81.447,132.558 C11.1@81.447,132.355 ; 81.447,131.821 C11.1@81.447,132.355 ; C11.1@81.447,132.355 80.073,132.355 78.879,131.161 Module1.1@78.879,129.994 78.879,117.169 J5.2@90.043,106.005 J6.2@90.043,103.084 90.043,101.46 88.997,100.414 C79.2@87.376,100.414 86.064,100.414 ; 85.725,99.64 85.75,99.615 ; 85.725,99.64 85.725,100.414 86.064,100.414
  Bottom Layer w0.4: C39.1@132.504,112.905 cw(c132.162,112.563) 132.645,112.563 cw(c133.128,112.563) C39.1@132.786,112.905 ; C39.1@132.645,112.833 132.645,110.89 140.665,102.87 144.145,102.87 Header7.10@145.415,101.6
  Bottom Layer w0.6: REG3.4@95.404,138.4 96.323,139.319 97.885,139.319 REG3.2@98.804,138.4 REG3.1@100.504,138.4 100.504,137.527 ; C45.1@100.209,136.368 100.209,137.232 100.504,137.527 ; C45.1@100.303,136.603 cw(c101.123,136.908) 100.504,137.527
  Bottom Layer w0.75: C48.1@100.209,134.336 C45.1@100.209,136.368
  Bottom Layer w1: C45.1@100.209,136.368 104.897,136.368 107.086,138.557 115.316,138.557 ; REG2.3@120.777,135.047 120.904,134.92 121.061,134.763 C41.1@121.061,131.699
  Bottom Layer w1.25: 115.316,138.557 118.953,134.92 REG2.3@120.904,134.92
ACCEL_INT1: FPGA1.55 IC2.11 | length 45.6
  Top Layer w0.21: FPGA1.55@118.852,75.844 120.324,75.844 v1(120.493,75.675) ; FPGA1.55@119.51,75.844 cw(c119.51,74.692) v1@120.325,75.507 ; 120.017,75.844 cw(c120.017,75.199) v1@120.473,75.655 ; 132.685,48.144 IC2.11@135.719,48.144
  Top Layer w0.254: v1@129.129,74.569 cw(c128.76,74.201) 129.281,74.201 cw(c129.803,74.201) v1@129.434,74.569 ; v1(129.281,74.722) 129.281,72.995 131.335,70.941 132.164,70.941 132.164,67.204 131.034,66.073 131.034,49.795 132.685,48.144
  Bottom Layer w0.254: v1(120.493,75.675) 125.7,75.675 126.652,74.722 v1(129.281,74.722)
ACCEL_INT2: FPGA1.57 IC2.9 | length 47.9
  Top Layer w0.21: FPGA1.57@118.852,76.844 120.176,76.844 120.188,76.856 120.209,76.835 ; v1@120.451,76.704 ccw(c120.209,76.545) 120.209,76.835 ; v1@120.451,76.966 cw(c120.209,77.125) 120.209,76.835 ; v1(120.65,76.835) 120.209,76.835 ; 135.047,49.144 IC2.9@135.719,49.144
  Top Layer w0.254: v1(130.094,77.999) 130.094,73.795 132.672,71.217 132.672,57.412 135.047,55.037 135.047,49.144
  Bottom Layer w0.254: v1(120.65,76.835) 120.636,76.821 120.59,76.821 120.544,76.868 120.544,79.595 121.541,80.593 125.656,80.593 128.25,77.999 v1(130.094,77.999)
ACCEL_SA0: FPGA1.53 IC2.7 | length 43.1
  Top Layer w0.21: FPGA1.53@118.852,74.844 120.767,74.844 ; IC2.7@136.936,49.278 136.936,54.224
  Top Layer w0.254: 120.767,74.844 v1(122.538,76.615) ; v1(133.269,72.451) 133.269,57.891 136.936,54.224
  Bottom Layer w0.254: v1(122.538,76.615) 125.789,76.615 126.83,75.573 129.66,75.573 132.782,72.451 ; v1@122.691,76.462 cw(c123.059,76.093) 123.059,76.615 cw(c123.059,77.136) v1@122.691,76.767 ; v1@133.109,72.306 ccw(c132.782,72.011) 132.782,72.451 ; v1@133.109,72.596 cw(c132.782,72.892) 132.782,72.451 ; v1(133.269,72.451) 132.782,72.451
ACCEL_SCL: FPGA1.43 IC2.4 R1.1 | length 45.8
  Top Layer w0.21: FPGA1.43@118.852,69.844 v1(123.171,69.844) ; v1@123.003,69.676 ccw(c122.597,69.269) 122.597,69.844 ccw(c122.597,70.419) v1@123.003,70.012 ; IC2.4@138.153,48.644 140.326,48.644 140.813,49.132 140.813,50.389
  Top Layer w0.254: v1(135.631,63.699) 135.631,57.222 140.813,52.04 140.813,50.389 v1(139.04,50.389)
  Bottom Layer w0.254: v1(123.171,69.844) 123.947,70.62 128.71,70.62 v1(135.631,63.699) ; R1.1@137.768,49.04 ccw(c137.671,49.271) 137.922,49.271 ; R1.1@137.922,48.673 137.922,49.271 ; R1.1@138.076,49.04 cw(c138.173,49.271) 137.922,49.271 ; v1@138.824,50.389 cw(c138.302,50.389) 138.671,50.02 cw(c139.04,49.652) v1@139.04,50.173 ; v1(139.04,50.389) 137.922,49.271
ACCEL_SDA: FPGA1.44 IC2.6 R2.2 | length 37.5
  Top Layer w0.21: FPGA1.44@118.852,70.344 122.311,70.344 ; IC2.6@137.436,49.278 137.436,50.122
  Top Layer w0.254: 122.311,70.344 122.587,70.62 123.63,70.62 v1(125.878,68.372) ; v1@131.618,62.327 cw(c131.249,61.958) 131.771,61.958 cw(c132.292,61.958) v1@131.923,62.327 ; v1(131.771,62.479) 131.771,52.421 v1(134.184,50.008) ; v1@137.55,50.433 cw(c137.158,50.4) 137.436,50.122 ; v1@137.747,50.236 ccw(c137.714,49.844) 137.436,50.122 ; v1(137.765,50.451) 137.436,50.122
  Bottom Layer w0.254: v1(125.878,68.372) v1(131.771,62.479) ; v1(134.184,50.008) 134.627,50.451 ; R2.2@135.056,50.225 ccw(c134.627,49.929) 134.627,50.451 ; R2.2@135.056,50.677 cw(c134.627,50.973) 134.627,50.451 ; v1(137.765,50.451) R2.2@135.509,50.451 134.627,50.451
ASDO: FPGA1.1 IC8.5 JEPC.9 | length 72.5
  Top Layer w0.21: FPGA1.1@99.552,65.044 99.554,64.449 99.554,63.047
  Top Layer w0.254: v1(95.855,42.024) 95.855,59.348 99.554,63.047
  Bottom Layer w0.254: v1(95.855,42.024) 119.858,18.021 IC8.5@121.539,18.021 122.398,18.021 122.398,13.305 120.645,11.552 120.645,8.828 JEPC.9@121.739,7.734
BAROMETER_/CS: IC5.5 IC7.76 | length 63.6
  Top Layer w0.165: IC7.76@54.356,72.231 54.991,72.231
  Top Layer w0.17: v1(53.691,67.305) 54.991,68.605 54.991,72.231
  Top Layer w0.254: IC5.5@8.322,52.48 8.322,51.486 8.327,51.481 ; v1@8.679,51.331 ccw(c8.327,50.992) 8.327,51.481 ; v1@8.679,51.631 cw(c8.327,51.971) 8.327,51.481 ; v1(8.835,51.481) 8.327,51.481
  Bottom Layer w0.254: v1(8.835,51.481) 29.586,51.481 35.382,57.277 42.613,57.277 43.333,57.996 43.932,57.996 44.098,57.831 45.639,57.831 46.863,59.055 46.863,60.96 47.077,61.174 48.379,61.174 49.685,62.48 49.685,65.35 50.618,65.35 52.07,66.802 53.188,66.802 v1(53.691,67.305) ; v1@53.475,67.305 cw(c52.954,67.305) 53.322,66.937 cw(c53.691,66.568) v1@53.691,67.089
BAROMETER_/SHDN: IC5.4 IC7.38 | length 86.4
  Top Layer w0.17: 36.262,78.232 IC7.38@38.704,78.232
  Top Layer w0.254: v1@4.072,79.142 cw(c3.551,79.142) 3.919,78.773 cw(c4.288,78.404) v1@4.288,78.926 ; v1(4.288,79.142) 1.9,76.754 1.621,76.754 1.316,76.449 1.316,46.173 2.637,44.852 6.117,44.852 8.979,47.714 8.979,49.414 8.822,49.571 8.822,49.995 ; IC5.4@8.322,50.33 IC5.4@8.322,49.995 ; v1(33.904,80.59) 36.262,78.232 ; IC5.4@8.322,49.995 8.822,49.995 ; IC5.4@8.322,49.995 8.822,49.995 ; 8.822,49.995 cw(c8.822,50.501) 8.435,50.175 ccw(c8.822,50.501) 8.822,49.995
  Bottom Layer w0.254: v1(4.288,79.142) 5.871,77.559 29.451,77.559 32.253,80.361 33.676,80.361 v1(33.904,80.59)
BAROMETER_DIN: Debug1.2 Header1.21 IC4.5 IC5.7 IC7.72 Module3.3 | length 126
  Top Layer w0.17: 50.729,67.214 IC7.72@50.729,70.707
  Top Layer w0.254: v1(2.916,60.041) IC4.5@4.381,60.041 ; IC5.7@5.822,52.48 v1(5.822,54.59) ; v1(9.012,39.797) 9.012,39.975 9.335,40.298 ; v1@9.22,39.856 cw(c9.655,39.979) 9.335,40.298 ; Module3.3@9.672,40.132 ccw(c9.335,39.873) 9.335,40.298 ; Module3.3@9.672,40.464 cw(c9.335,40.723) 9.335,40.298 ; Module3.3@10.239,40.298 9.335,40.298 ; v1@11.062,52.807 cw(c10.814,52.753) 10.994,52.573 ; v1@11.227,52.642 ccw(c11.173,52.394) 10.994,52.573 ; v1(11.273,52.853) 10.994,52.573 ; v1(50.059,66.543) 50.729,67.214 ; v1@50.059,66.759 ccw(c50.059,67.281) 50.428,66.912 ccw(c50.796,66.543) v1@50.275,66.543 ; 9.335,40.298 9.139,40.494 9.139,43.15 10.994,45.004 10.994,52.573
  Bottom Layer w0.254: Header1.21@1.651,9.652 8.024,16.025 8.024,36.061 9.73,37.768 9.73,39.079 v1(9.012,39.797) ; v1(2.916,60.041) 2.269,59.393 2.269,56.244 3.922,54.59 ; v1(5.822,54.59) 3.922,54.59 ; 10.249,52.645 ccw(c10.249,53.876) v1@11.12,53.006 ; 10.863,52.645 ccw(c10.863,53.263) v1@11.3,52.826 ; v1(11.273,52.853) v1@11.384,52.742 ; v1@49.843,66.543 cw(c49.321,66.543) 49.69,66.175 cw(c50.059,65.806) v1@50.059,66.327 ; v1(50.059,66.543) 49.177,65.662 49.177,62.69 48.209,61.722 46.907,61.722 46.355,61.17 46.355,59.309 45.385,58.339 44.308,58.339 44.143,58.504 43.122,58.504 42.53,57.912 34.417,57.912 29.247,52.742 Debug1.2@16.897,52.742 v1@11.384,52.742 ; 3.922,54.59 4.862,53.651 5.878,53.651 6.884,52.645 11.176,52.645 v1@11.273,52.742 ; v1@11.273,52.742 v1@11.384,52.742 ; v1@11.273,52.742 v1@11.384,52.742
BAROMETER_DOUT: Debug1.3 Header1.22 IC4.2 IC5.6 IC7.9 Module3.7 | length 150.9
  Top Layer w0.17: 48.229,84.587 IC7.9@48.229,85.756
  Top Layer w0.175: 48.229,84.587 49.144,83.672
  Top Layer w0.254: IC5.6@6.967,52.835 ccw(c6.715,53.087) 7.072,53.087 ccw(c7.429,53.087) IC5.6@7.177,52.835 ; IC5.6@7.072,52.48 7.072,53.554 v1(7.239,53.721) ; IC5.6@7.072,52.796 cw(c8.164,52.796) v1@7.392,53.568 ; 7.072,53.41 cw(c7.551,53.41) v1@7.212,53.748 ; v1(8.763,35.687) v1@8.907,35.543 ; IC4.2@11.681,57.501 12.619,57.501 13.127,56.993 ; v1@13.165,56.739 ccw(c12.644,56.739) 13.012,57.108 ccw(c13.381,57.476) v1@13.381,56.955 ; v1@13.228,56.586 cw(c12.653,56.011) 13.467,56.011 ; v1(18.309,69.566) 18.309,62.327 13.127,57.145 13.127,56.993 ; v1(49.144,80.488) 49.144,83.672 ; v1@8.907,35.543 v1@8.907,35.781 ; v1@8.907,35.543 v1@8.907,35.781 ; v1@8.907,35.781 9.025,35.898 Module3.7@10.239,35.898 11.412,35.898 12.691,37.177 12.691,39.519 13.166,39.994 13.166,41.95 12.691,42.425 12.691,44.374 11.502,45.563 11.502,48.128 13.467,50.093 13.467,56.654 v1(13.381,56.739) 13.127,56.993 ; 13.127,56.993 ccw(c13.262,57.128) 13.318,56.946 cw(c13.262,57.128) 13.127,56.993 ; 13.127,56.993 cw(c12.992,56.858) 13.175,56.802 ccw(c12.992,56.858) 13.127,56.993
  Bottom Layer w0.254: Header1.22@1.651,7.112 8.725,14.186 8.725,35.598 v1@8.907,35.781 ; v1@7.239,53.505 cw(c7.239,53.143) 7.495,53.399 ; v1(7.239,53.721) 7.239,53.655 7.66,53.234 10.282,53.234 11.019,53.97 11.019,55.977 11.811,56.769 ; v1@7.455,53.721 ccw(c8.136,53.721) 7.655,53.239 ; v1(8.763,35.687) v1@8.907,35.543 ; v1@8.788,35.662 v1@8.907,35.781 ; Debug1.3@16.897,55.282 15.41,56.769 ; v1(18.309,69.566) 18.974,70.231 39.252,70.231 39.269,70.214 43.099,70.214 43.366,69.947 43.366,69.02 43.639,68.747 43.639,68.125 44.039,67.724 46.592,67.724 47.392,68.525 47.392,73.617 46.515,74.494 46.515,77.859 v1(49.144,80.488) ; v1@8.907,35.543 v1@8.907,35.781 ; v1@8.907,35.543 v1@8.907,35.781 ; 11.811,56.769 15.41,56.769 ; 11.811,56.769 15.41,56.769 ; 12.787,56.769 cw(c12.787,56.145) 13.228,56.586 ccw(c12.787,56.145) 12.787,56.769 ; 12.932,56.769 ccw(c12.932,57.188) 13.228,56.892 cw(c12.932,57.188) 12.932,56.769
BAROMETER_SCLK: Debug1.4 Header1.20 IC4.6 IC5.8 IC7.70 Module3.5 | length 141.2
  Top Layer w0.17: v1@49.547,68.708 ccw(c49.106,69.148) 49.729,69.148 ccw(c50.352,69.148) v1@49.912,68.708 ; v1(49.729,68.525) IC7.70@49.729,70.707
  Top Layer w0.254: IC4.6@4.381,58.771 3.653,58.771 ; IC5.8@4.572,52.48 IC5.8@4.572,52.472 ; 8.276,38.571 ccw(c8.98,38.571) v1@8.482,38.073 ; 8.276,39.185 ccw(c9.594,39.185) 8.662,38.253 ccw(c9.035,38.626) 9.035,38.098 ; v1@8.662,37.947 cw(c9.026,37.583) 9.026,38.098 ; Module3.5@9.696,37.905 ccw(c9.23,37.439) 9.23,38.098 ccw(c9.23,38.757) Module3.5@9.696,38.291 ; Module3.5@10.239,38.098 v1@8.511,38.098 ; v1@2.993,58.111 3.653,58.771 ; v1@2.993,58.111 3.653,58.771 ; v1@2.993,58.111 2.993,52.878 3.399,52.472 ; 3.399,52.472 IC5.8@4.572,52.472 ; 3.399,52.472 IC5.8@4.572,52.472 ; IC5.8@4.572,52.472 2.815,50.715 2.815,47.849 3.413,47.251 6.078,47.251 6.676,47.849 6.676,49.322 6.447,49.551 6.447,53.081 6.345,53.183 6.345,53.945 7.196,54.796 9.762,54.796 10.486,54.072 10.486,45.538 8.276,43.328 v1@8.276,38.333 ; v1@8.276,38.333 v1@8.511,38.098 ; v1@8.276,38.333 v1@8.511,38.098 ; 4.195,52.472 ccw(c4.195,52.857) 4.467,52.585 cw(c4.195,52.857) 4.195,52.472 ; 4.234,52.472 cw(c4.234,52.142) 4.467,52.375 ccw(c4.234,52.142) 4.234,52.472
  Bottom Layer w0.254: Header1.20@1.651,12.192 7.516,18.057 7.516,36.272 7.732,36.488 7.732,36.817 8.509,37.595 ; v1@2.842,58.321 ccw(c2.492,58.679) 2.993,58.679 ; v1(2.993,58.166) 2.993,58.679 ; v1@3.143,58.321 cw(c3.493,58.679) 2.993,58.679 ; v1@8.36,37.944 cw(c8.026,37.595) 8.509,37.595 ; v1(8.509,38.1) 8.509,37.595 ; v1@8.658,37.944 ccw(c8.992,37.595) 8.509,37.595 ; v1(49.729,68.525) 47.265,66.061 39.645,66.061 31.406,57.822 Debug1.4@16.897,57.822 15.363,59.355 3.669,59.355 2.993,58.679
BLED_BLUE1: FPGA1.69 Header7.34 | length 44.3
  Top Layer w0.21: FPGA1.69@118.852,82.844 120.182,82.844 v1(120.95,83.612)
  Bottom Layer w0.254: v1(120.95,83.612) 122.309,84.971 124.493,84.971 124.748,84.717 130.698,84.717 130.888,84.908 145.893,84.908 147.519,83.282 147.519,73.224 Header7.34@145.415,71.12 ; v1@120.95,83.828 ccw(c120.95,84.35) 121.319,83.981 ccw(c121.688,83.612) v1@121.166,83.612
BLED_BLUE2: FPGA1.70 Header7.36 | length 48.9
  Top Layer w0.21: v1(117.394,83.344) FPGA1.70@118.852,83.344 ; v1@117.562,83.176 cw(c117.969,82.769) 117.969,83.344 cw(c117.969,83.919) v1@117.562,83.512
  Top Layer w0.254: v1(138.857,83.18) 138.857,74.951 139.213,74.595 v1(139.213,70.963)
  Bottom Layer w0.254: v1@117.394,83.128 cw(c117.394,82.607) 117.763,82.975 cw(c118.132,83.344) v1@117.61,83.344 ; v1(117.394,83.344) 117.864,82.874 121.272,82.874 121.464,83.066 135.453,83.066 136.012,83.625 138.413,83.625 v1(138.857,83.18) ; v1@138.641,83.18 ccw(c138.12,83.18) 138.488,83.549 ccw(c138.857,83.918) v1@138.857,83.396 ; v1@139.113,70.771 cw(c139.028,70.607) 139.213,70.607 ; v1@139.175,70.963 ccw(c139.942,70.963) 139.399,70.421 ; v1(139.213,70.963) 139.213,70.607 ; v1@139.312,70.771 ccw(c139.397,70.607) 139.213,70.607 ; v1@139.429,70.963 ccw(c140.809,70.963) 139.833,69.987 ; Header7.36@145.415,68.58 144.318,67.483 142.337,67.483 139.213,70.607
BLED_BLUE3: FPGA1.71 Header7.38 | length 54.2
  Top Layer w0.21: FPGA1.71@118.852,83.844 119.845,83.844 v1(120.315,84.314) ; FPGA1.71@119.602,83.889 ccw(c119.602,84.584) v1@120.094,84.093 ; v1@120.077,84.314 cw(c119.503,84.314) 119.909,83.908 cw(c120.315,83.502) v1@120.315,84.076
  Bottom Layer w0.254: v1(120.315,84.314) 121.48,85.479 125.001,85.479 125.256,85.225 130.19,85.225 130.672,85.708 137.803,85.708 139.543,87.448 146.934,87.448 148.027,86.355 148.027,68.652 Header7.38@145.415,66.04
BLED_BLUE4: FPGA1.72 Header7.40 | length 73.5
  Top Layer w0.21: FPGA1.72@118.852,84.344 FPGA1.72@118.639,84.344 ; FPGA1.72@118.639,84.344 v1(118.639,88.133) FPGA1.72@118.639,84.344
  Top Layer w0.254: v1@139.441,90.317 cw(c139.072,89.949) 139.594,89.949 cw(c140.115,89.949) v1@139.747,90.317 ; v1(139.594,90.47) 139.594,75.764 139.949,75.408 139.949,70.226 138.883,69.16 138.883,63.089 140.203,61.768 146.985,61.768 147.29,62.073 v1(147.29,63.5)
  Bottom Layer w0.254: v1(118.639,88.133) 119.248,88.743 122.017,88.743 123.249,87.511 126.348,87.511 128.824,89.988 137.714,89.988 138.197,90.47 v1(139.594,90.47) ; v1@118.639,88.349 ccw(c118.639,88.871) 119.008,88.502 ccw(c119.376,88.133) v1@118.855,88.133 ; v1@139.441,90.317 ccw(c139.072,89.949) 139.072,90.47 ccw(c139.072,90.992) v1@139.441,90.623 ; Header7.40@145.415,63.5 v1(147.29,63.5)
BLED_ORANGE1: FPGA1.63 Header7.26 | length 41.4
  Top Layer w0.21: FPGA1.63@118.852,79.844 v1@122.051,79.844 ; 121.454,79.844 cw(c121.454,79.214) v1@121.9,79.659 ; 121.533,79.844 ccw(c121.533,80.363) v1@121.9,79.996
  Top Layer w0.254: v1@122.051,79.844 v1(122.068,79.828)
  Bottom Layer w0.254: v1(122.068,79.828) 124.265,77.631 126.836,77.631 127.788,76.678 135.377,76.678 136.952,75.103 143.353,75.103 144.166,74.29 144.166,73.249 144.852,72.563 145.944,72.563 147.011,73.63 147.011,79.684 Header7.26@145.415,81.28
BLED_ORANGE2: FPGA1.64 Header7.28 | length 37.3
  Top Layer w0.21: v1(117.242,80.234) 117.352,80.344 FPGA1.64@118.852,80.344 ; v1@117.262,80.214 cw(c117.575,79.901) 117.575,80.344 ; v1@117.41,80.066 cw(c118.082,79.394) FPGA1.64@118.082,80.344
  Bottom Layer w0.254: v1@117.089,80.081 cw(c116.168,79.161) 117.47,79.161 ; v1(117.242,80.234) 117.47,80.005 117.47,78.659 119.731,78.659 120.01,78.939 120.01,80.031 121.103,81.123 121.56,81.123 122.487,82.05 129.573,82.05 131.618,80.005 143.212,80.005 144.478,78.74 Header7.28@145.415,78.74 ; v1@117.269,80.261 cw(c116.782,79.774) 117.47,79.774